# Altium PCB adc_wing.PcbDoc
Units mil, origin at the board's own origin, x right, y up, seen from the top; angles counter-clockwise.
Board outline 1265 x 800 mil, 2 copper layers (Top Layer, Bottom Layer); 11 components, 18 nets, 62 pads, 12 vias.
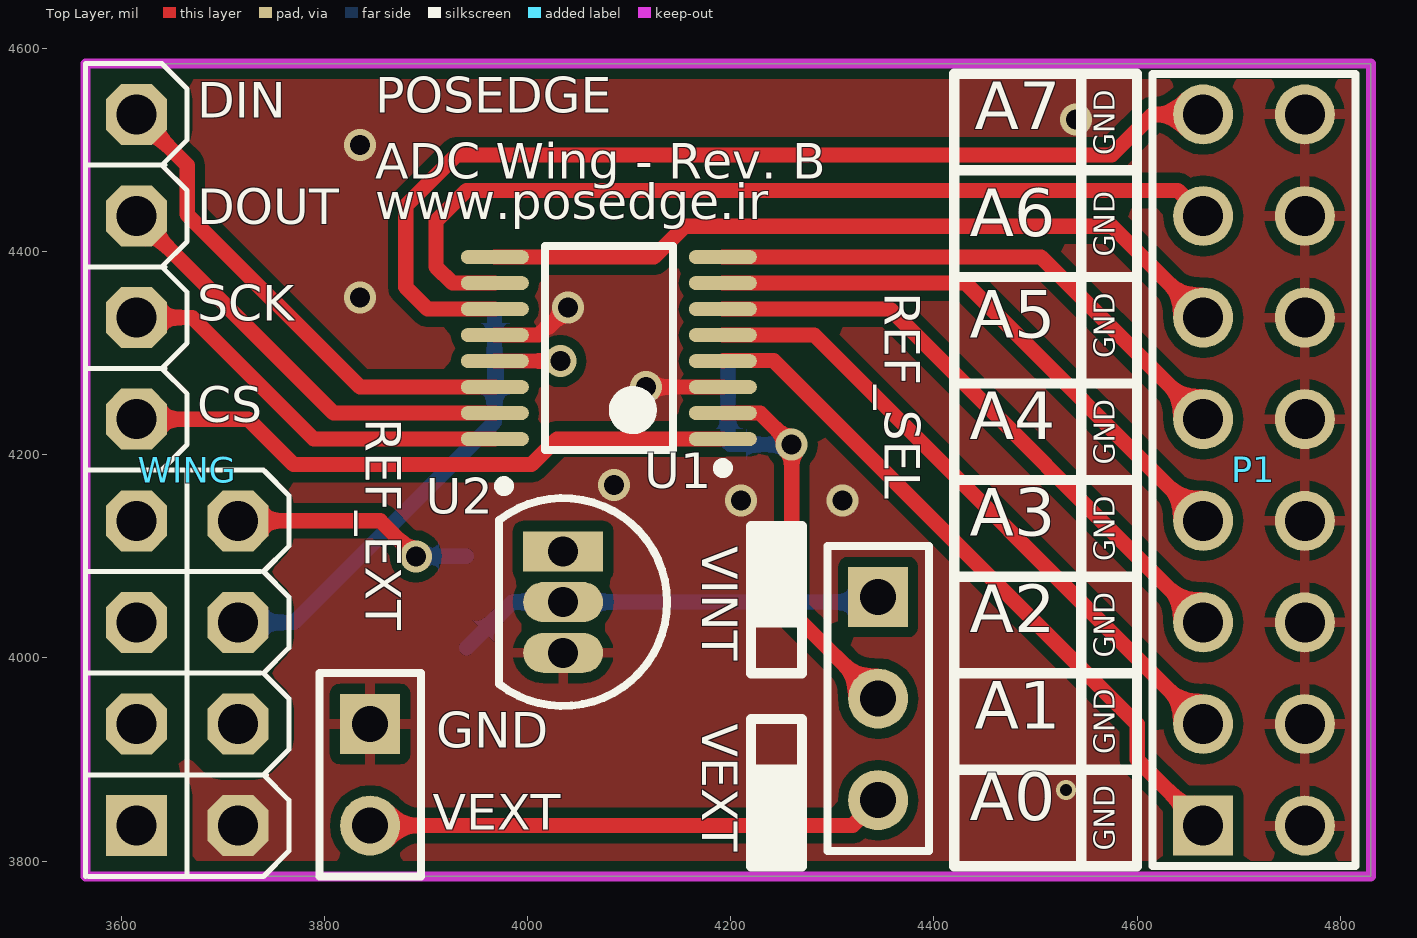
[diagram p0: Top Layer view]
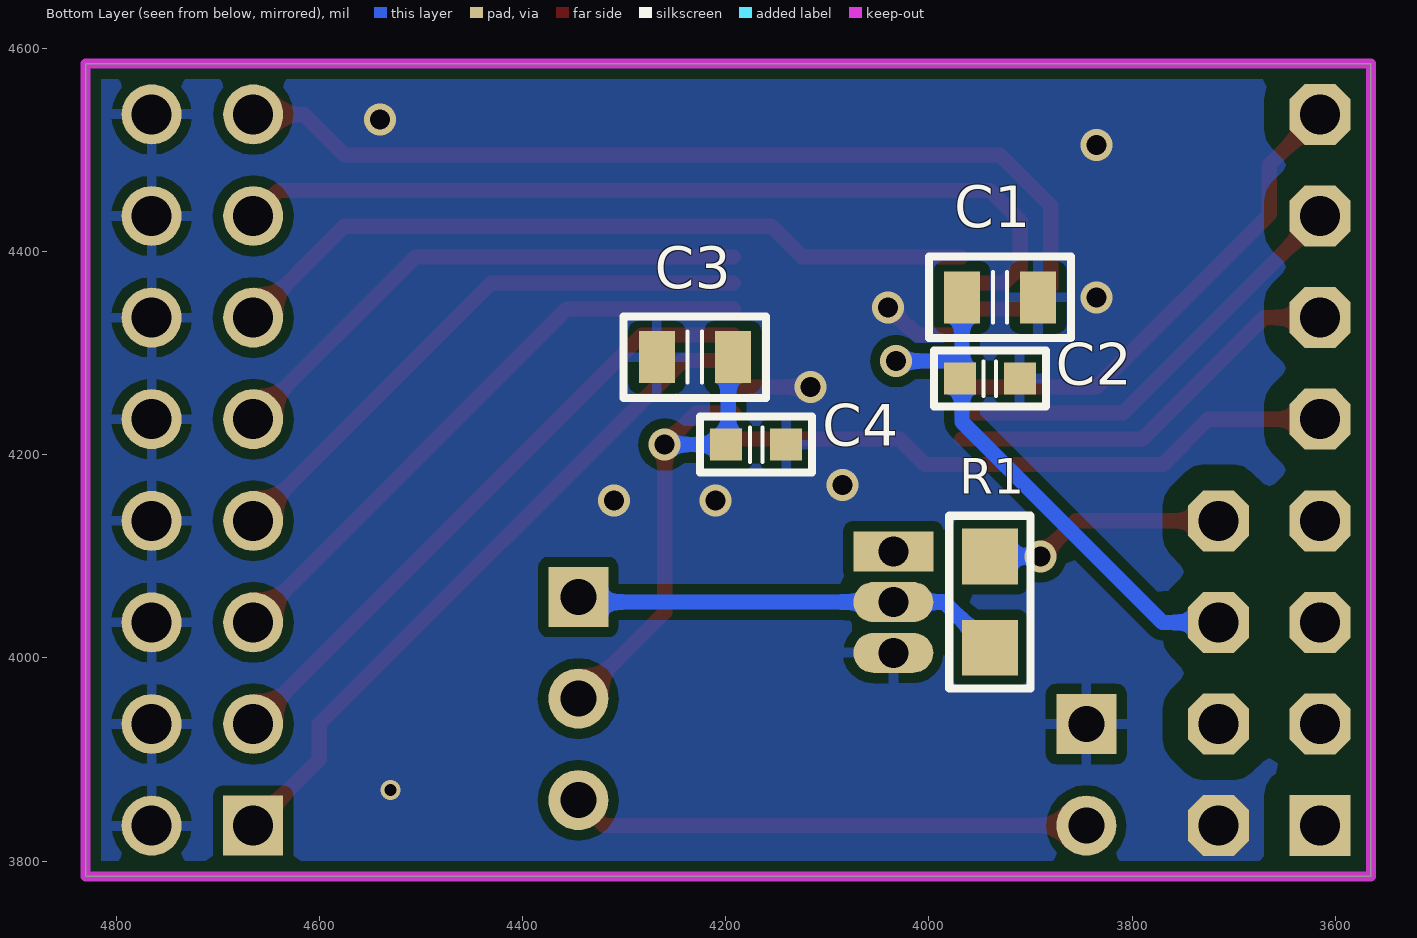
[diagram p1: Bottom Layer view, seen from below]

## Layer stack, top to bottom
Top Solder: solder mask 0.4, Solder Resist, Dk 3.5
Top Layer: signal copper 1.4
Dielectric 1: dielectric 12.6, FR-4, Dk 4.8
Bottom Layer: signal copper 1.4
Bottom Solder: solder mask 0.4, Solder Resist, Dk 3.5

## Board outline
3565,3785 4830,3785 4830,4585 3565,4585

## Design rules (kind name [scope] priority, off if disabled: settings)
Clearance [InNet('GND') vs InComponent('W*')] p1: gap=25
Clearance Clearance_poly_to_all [InNet('GND','VCC3V3') and InPoly] p2: gap=10
Clearance Clearance_all_to_all [All] p3: gap=10
ComponentClearance [All] p1: gap=0 collisioncheckmode=3 verticalgap=10 showdistances=FALSE
DiffPairsRouting [All] p1: maxlimit=10 minlimit=10 mostfreqgap=10 toplayer_minwidth=10 toplayer_maxwidth=15 toplayer_prefwidth=15 bottomlayer_minwidth=10 bottomlayer_maxwidth=15 bottomlayer_prefwidth=15 maxuncoupledlength=500
HoleSize [All] p1: absolutevalues=TRUE maxlimit=150 minlimit=1 maxpercent=80.000 minpercent=20.000
MinimumSolderMaskSliver [All] p1: minsoldermaskwidth=1
PlaneClearance [All] p1: clearance=10
PolygonConnect [InComponent('WING')] p1: connectstyle=Direct reliefconductorwidth=10 reliefentries=4 polygonreliefangle="90 Angle" airgapwidth=10
PolygonConnect PolygonConnect_via [IsVia] p2: connectstyle=Direct reliefconductorwidth=10 reliefentries=4 polygonreliefangle="90 Angle" airgapwidth=10
PolygonConnect PolygonConnect_GND [InNet('GND')] p3: connectstyle=Relief reliefconductorwidth=10 reliefentries=4 polygonreliefangle="90 Angle" airgapwidth=10
PolygonConnect PolygonConnect_VCC3V3 [InNet('VCC3V3')] p4: connectstyle=Relief reliefconductorwidth=10 reliefentries=4 polygonreliefangle="90 Angle" airgapwidth=10
RoomDefinition adc_wing [InComponentClass('adc_wing')] p1 off: confinementstyle=ConfineIn formatcopy=TRUE lockcomponents=FALSE outline 0,0 2000,0 2000,1000 0,1000
RoutingCorners RoutingCorners_1 [OnLayer('Top Overlay')] p1: cornerstyle=90-Degree minsetback=100 maxsetback=100
RoutingCorners [All] p2: cornerstyle=45-Degree minsetback=100 maxsetback=100
RoutingVias [All] p1: holewidth=19.68 width=31.5 viastyle="Through Hole" minholewidth=11.81 minwidth=19.68 maxholewidth=31.5 maxwidth=47.24
SilkToSilkClearance [All] p1: silktosilkclearance=1
SilkToSolderMaskClearance [IsPad] p1: minsilkscreentomaskgap=2 clearancetoexposedcopper=TRUE
SolderMaskExpansion [All] p1: expansion=4
ViasUnderSMD [All] p1: allowed=FALSE
Width [All] p1: maxlimit=75 minlimit=10 preferedwidth=10 minimp=50.000000 maximp=50.000000 favimp=50.000000
22 further rules are at their usual default settings.

## Components (designator, comment, footprint, x,y, rotation, side; value= is the part's Value field where it differs from the comment)
C1 "1uF" C0805 3930,4355 r0 bottom
C2 "100nF" C0603 3940,4275 r0 bottom
C3 "1uF" C0805 4230.41,4296.11 r180 bottom
C4 "100nF" C0603 4170,4210 r0 bottom
P1 "Header 8X2" HDR2X8 4665,3835 r90 top
R1 "909" R0805 3940,4055 r270 bottom
REF_EXT "V_REF_EXT" PLS-2-3D 3845,3935 r270 top (schematic designator J2)
REF_SEL "V_REF_SEL" PLS-3-3D 4345,4060 r270 top (schematic designator J1)
U1 "ADC128S102CIMTX" MTC16_N 4080,4305 r180 top
U2 "LM4040AIZ-4.1" Z03A 4035,4055 r180 top
WING "WING8" WINGSIDE_8BIT 3565,4585 r270 top locked

## Footprints (in the part's own frame and the unit in brackets; to place one, negate y for a bottom-side part, rotate by r counter-clockwise, add the part's x,y. Pads: shape width x height; smd on the part's side, far side on the other; paste and mask are expansions set on the pad)
C0603 [mm]
  rect 0.8x0.8 smd: 1(-0.75,0) 2(0.75,0)
  silkscreen extent -1.4,-0.7 1.4,0.7, body extent -0.8,-0.42 0.8,0.44, height 0.79
C0805 [mm]
  rect 0.9x1.3 smd: 1(-0.95,0) 2(0.95,0)
  silkscreen extent -1.78,-1.02 1.78,1.02, body extent -1,-0.6 1,0.6, height 1.5
HDR2X8 [mm] "Connector; Header; 8x2 Position"
  rect 1.5x1.5 hole 1: 1(0,0)
  round 1.5 hole 1: 2(0,-2.54) 3(2.54,0) 4(2.54,-2.54) 5(5.08,0) 6(5.08,-2.54) 7(7.62,0) 8(7.62,-2.54) 9(10.16,0) 10(10.16,-2.54) 11(12.7,0) 12(12.7,-2.54) 13(15.24,0) 14(15.24,-2.54) 15(17.78,0) 16(17.78,-2.54)
  silkscreen extent -1.02,-3.81 18.8,1.27
MTC16_N [mm] "TSOP, 16-Leads, Body 5x4.4mm, Pitch 0.65mm, IPC Medium Density"
  oval 1.7x0.35 smd: 1(-2.85,2.275) 2(-2.85,1.625) 3(-2.85,0.975) 4(-2.85,0.325) 5(-2.85,-0.325) 6(-2.85,-0.975) 7(-2.85,-1.625) 8(-2.85,-2.275) 9(2.85,-2.275) 10(2.85,-1.625) 11(2.85,-0.975) 12(2.85,-0.325) 13(2.85,0.325) 14(2.85,0.975) 15(2.85,1.625) 16(2.85,2.275)
  silkscreen extent -2.98,-2.55 1.6,3.12, body extent -2.25,-2.55 2.25,2.55, height 1.1
PLS-2-3D [mm] "Connector; Header; 2 Position"
  rect 1.5x1.5 hole 0.9: 1(0,0)
  round 1.5 hole 0.9: 2(2.54,0)
  silkscreen extent -1.27,-1.27 3.81,1.27, body extent -1.27,-1.27 3.81,1.27, height 8.44
PLS-3-3D [mm] "Connector; Header; 3 Position"
  rect 1.5x1.5 hole 0.9: 1(0,0)
  round 1.5 hole 0.9: 2(2.54,0) 3(5.08,0)
  silkscreen extent -1.27,-1.27 6.35,1.27, body extent -1.27,-1.27 6.35,1.27, height 8.44
R0805 [mil]
  rect 55x55 smd: 1(-45,0) 2(45,0)
  silkscreen extent -85,-40 85,40, body extent -39,-24 39,24, height 20
WINGSIDE_8BIT [mil]
  rect 60x60 hole 39.37: 0(750,50)
  oct 60x60 hole 39.37: 1(650,50) 2(550,50) 2V5@2(650,150) 3(450,50) 3V3@2(550,150) 4(350,50) 5(250,50) 5V@2(450,150) 6(150,50) 7(50,50) GND@2(750,150)
  silkscreen extent 0,0 800,200
Z03A [mm] "TO, Flat Index; 3 In-Line, Axial Leads; Body Dia. 5mm; Leads 0.55 x 0.50 mm (max)"
  rect 2x1 hole 0.75: 1(0,-1.27)
  oval 2x1 hole 0.75: 2(0,0) 3(0,1.27)
  silkscreen extent -2.6,-3.02 1.6,2.6, body extent -2.6,-2.61 1.6,2.61, height 5.2

## Part data
C1 C3: library part C0805, "Ceramic Capactor size 0805"
C2 C4: library part C0603, "Ceramic Capactor size 0603"
P1: "Header, 8-Pin, Dual row"
R1: library part R0805, "Chip Resistor size 0805"
REF_EXT: library part PLS-2, "Header, 2-Pin"
REF_SEL: library part PLS-3, "Header, 3-Pin"
U1: library part ADC128S022CIMTX, "8-Channel, 50 kSPS to 200 kSPS, 12-Bit A/D Converter, 16-pin TSSOP"
U2: "Precision Micropower Shunt Voltage Reference, 3-pin TO-92"

## Via types
v1: diameter 31.5, hole 19.68, Top Layer to Bottom Layer, tented both sides, 11 vias
v2: diameter 19.68, hole 11.81, Top Layer to Bottom Layer, tented both sides, 1 vias

## Nets (pads, with @x,y where several pads share a name; then routed paths per layer and width w, separated by ;. In a path a pad name is that pad's centre, name@x,y a point inside that pad or via, vN(x,y) a via of type N, cw(c..) or ccw(c..) an arc to the next point about the centre after c; other vN are vias at no path point)
A0: P1.1 U1.4 | length 683.2
  Top Layer w15: U1.4 4192.8,4292.8 4242.2,4292.8 4600,3935 4600,3900 P1.1
A1: P1.3 U1.5 | length 631.4
  Top Layer w15: U1.5 4282.2,4317.8 P1.3
A2: P1.5 U1.6 | length 600.5
  Top Layer w15: U1.6 4356.61,4343.39 P1.5
A3: P1.7 U1.7 | length 569.7
  Top Layer w15: U1.7 4431.02,4368.98 P1.7
A4: P1.9 U1.8 | length 538.9
  Top Layer w15: U1.8 4505.43,4394.57 P1.9
A5: P1.11 U1.9 | length 747.1
  Top Layer w15: U1.9 4124.57,4394.57 4155,4425 4575,4425 P1.11
A6: P1.13 U1.10 | length 897.2
  Top Layer w15: U1.10 3926.02,4368.98 3910,4385 3910,4430 3940,4460 4640,4460 P1.13 P1.13@4655,4435
A7: P1.15 U1.11 | length 999
  Top Layer w15: U1.11 3901.61,4343.39 3880,4365 3880,4445 3930,4495 4575,4495 4615,4535 P1.15
CS: U1.1 WING.4 | length 606
  Top Layer w15: WING.4 3725,4235 3769.57,4190.43 4003.86,4190.43 4028.86,4215.43 U1.1
DIN: U1.14 WING.7 | length 492.3
  Top Layer w15: WING.7 3665,4485 3665,4436.61 3835,4266.61 U1.14
DOUT: U1.15 WING.6 | length 433.1
  Top Layer w15: WING.6 3808.98,4241.02 U1.15
GND: C1.1 C2.1 C3.1 C4.1 P1.2 P1.4 P1.6 P1.8 P1.10 P1.12 P1.14 P1.16 REF_EXT.1 U1.3 U1.12 U2.3 WING.GND@2 | length 161.3
  Top Layer w15: U1.12 4010.78,4317.8 4018.43,4325.45 4020.45,4325.45 v1(4040,4345) ; v1@4115,4265 v1(4116.61,4266.61) U1.3
  other v1: 4210,4155 4310,4155 4085,4170 3835,4355 3835,4505 4540,4530
  other v2: 4530,3870
SCK: U1.16 WING.5 | length 402.3
  Top Layer w15: WING.5 3670,4335 3789.57,4215.43 U1.16
VA: C3.2 C4.2 REF_SEL.2 U1.2 | length 507.2
  Top Layer w15: U1.2 4228.98,4241.02 v1(4260,4210) 4260,4045 REF_SEL.2
  Bottom Layer w15: C3.2@4197.4,4290 4197.4,4212.13 C4.2 v1(4260,4210)
VCC5V0: R1.1 WING.5V@2 | length 239.5
  Top Layer w15: 3715,4135 3855,4135 v1(3890,4100)
  Bottom Layer w15: v1(3890,4100) R1.1
VD: C1.2 C2.2 U1.13 WING.3V3@2 | length 581.1
  Top Layer w15: U1.13 v1(4032.2,4292.2)
  Bottom Layer w15: 3715,4035 3770,4035 3967.4,4232.4 C1.2@3967.4,4335 ; C2.2 3969.53,4292.2 v1(4032.2,4292.2)
VREF4.096: R1.2 REF_SEL.1 U2.2 | length 425.7
  Bottom Layer w15: R1.2 3985,4055 U2.2 4340,4055 REF_SEL.1
VREFEXT: REF_EXT.2 REF_SEL.3 | length 510.4
  Top Layer w15: REF_EXT.2 4320,3835 REF_SEL.3
pads on no net: U2.1 WING.0 WING.1 WING.2 WING.2V5@2 WING.3

## Polygon pours and split planes (outlines as drawn)
GND on Bottom Layer "Top Layer-No Net" (solid, pour order 2): 3565,4585 4830,4585 4830,3785 3565,3785
GND on Top Layer "Top Layer-No Net" (solid, remove dead copper, pour order 0): 3565,4585 4830,4585 4830,3805 4830,3795 4830,3785 4810,3785 3565,3785

## Keep-outs
Keep-Out Layer:
  the board outline again, w10

## Silkscreen, mask and mechanical layers (free items; w line width, h text height)
Top Overlay:
  rectangle: 4220,4030 4270,4130
  rectangle: 4220,3795 4270,3895
  lines w10: 4420,3890 4600,3890 ; 4420,3985 4600,3985 ; 4420,4080 4600,4080 ; 4420,4175 4600,4175 ; 4420,4270 4600,4270 ; 4420,4375 4600,4375 ; 4420,4480 4600,4480 ; 4545,3800 4545,4575 ; 4220,3795 4270,3795 4270,3940 4220,3940 4220,3795 ; 4220,3985 4220,4130 4270,4130 4270,3985 4220,3985 ; 4420,3795 4600,3795 4600,4575 4420,4575 4420,3795
  text "POSEDGE" at 3850,4525 h60
  text "DIN" at 3675,4520 h60
  text "A7" at 4440,4505 h80
  text "GND" at 4585,4495 h35 r90
  text "ADC Wing - Rev. B" at 3850,4460 h60
  text "www.posedge.ir" at 3850,4420 h60
  text "DOUT" at 3675,4415 h60
  text "A6" at 4435,4400 h80
  text "GND" at 4585,4395 h35 r90
  text "SCK" at 3675,4320 h60
  text "A5" at 4435,4300 h80
  text "GND" at 4585,4295 h35 r90
  text "CS" at 3675,4220 h60
  text "A4" at 4435,4200 h80
  text "GND" at 4585,4190 h35 r90
  text "VINT" at 4160,4110 h60 r270
  text "A3" at 4435,4105 h80
  text "GND" at 4585,4095 h35 r90
  text "A2" at 4435,4010 h80
  text "GND" at 4585,4000 h35 r90
  text "VEXT" at 4160,3935 h60 r270
  text "A1" at 4440,3915 h80
  text "GND" at 4585,3905 h35 r90
  text "GND" at 3910,3900 h60
  text "A0" at 4435,3825 h80
  text "VEXT" at 3906.5,3819 h60
  text "GND" at 4585,3810 h35 r90

## Dimensions
4830,4585 to 4830,3785 on Mechanical 1
3565,3770 to 4830,3785 on Mechanical 1